# Altium PCB PCB_Motherboard.PcbDoc
Units mm, origin at the board's own origin, x right, y up, seen from the top; angles counter-clockwise.
Board outline 36.5 x 36.5 mm, 2 copper layers (Top Layer, Bottom Layer); 36 components, 36 nets, 146 pads, 310 vias.
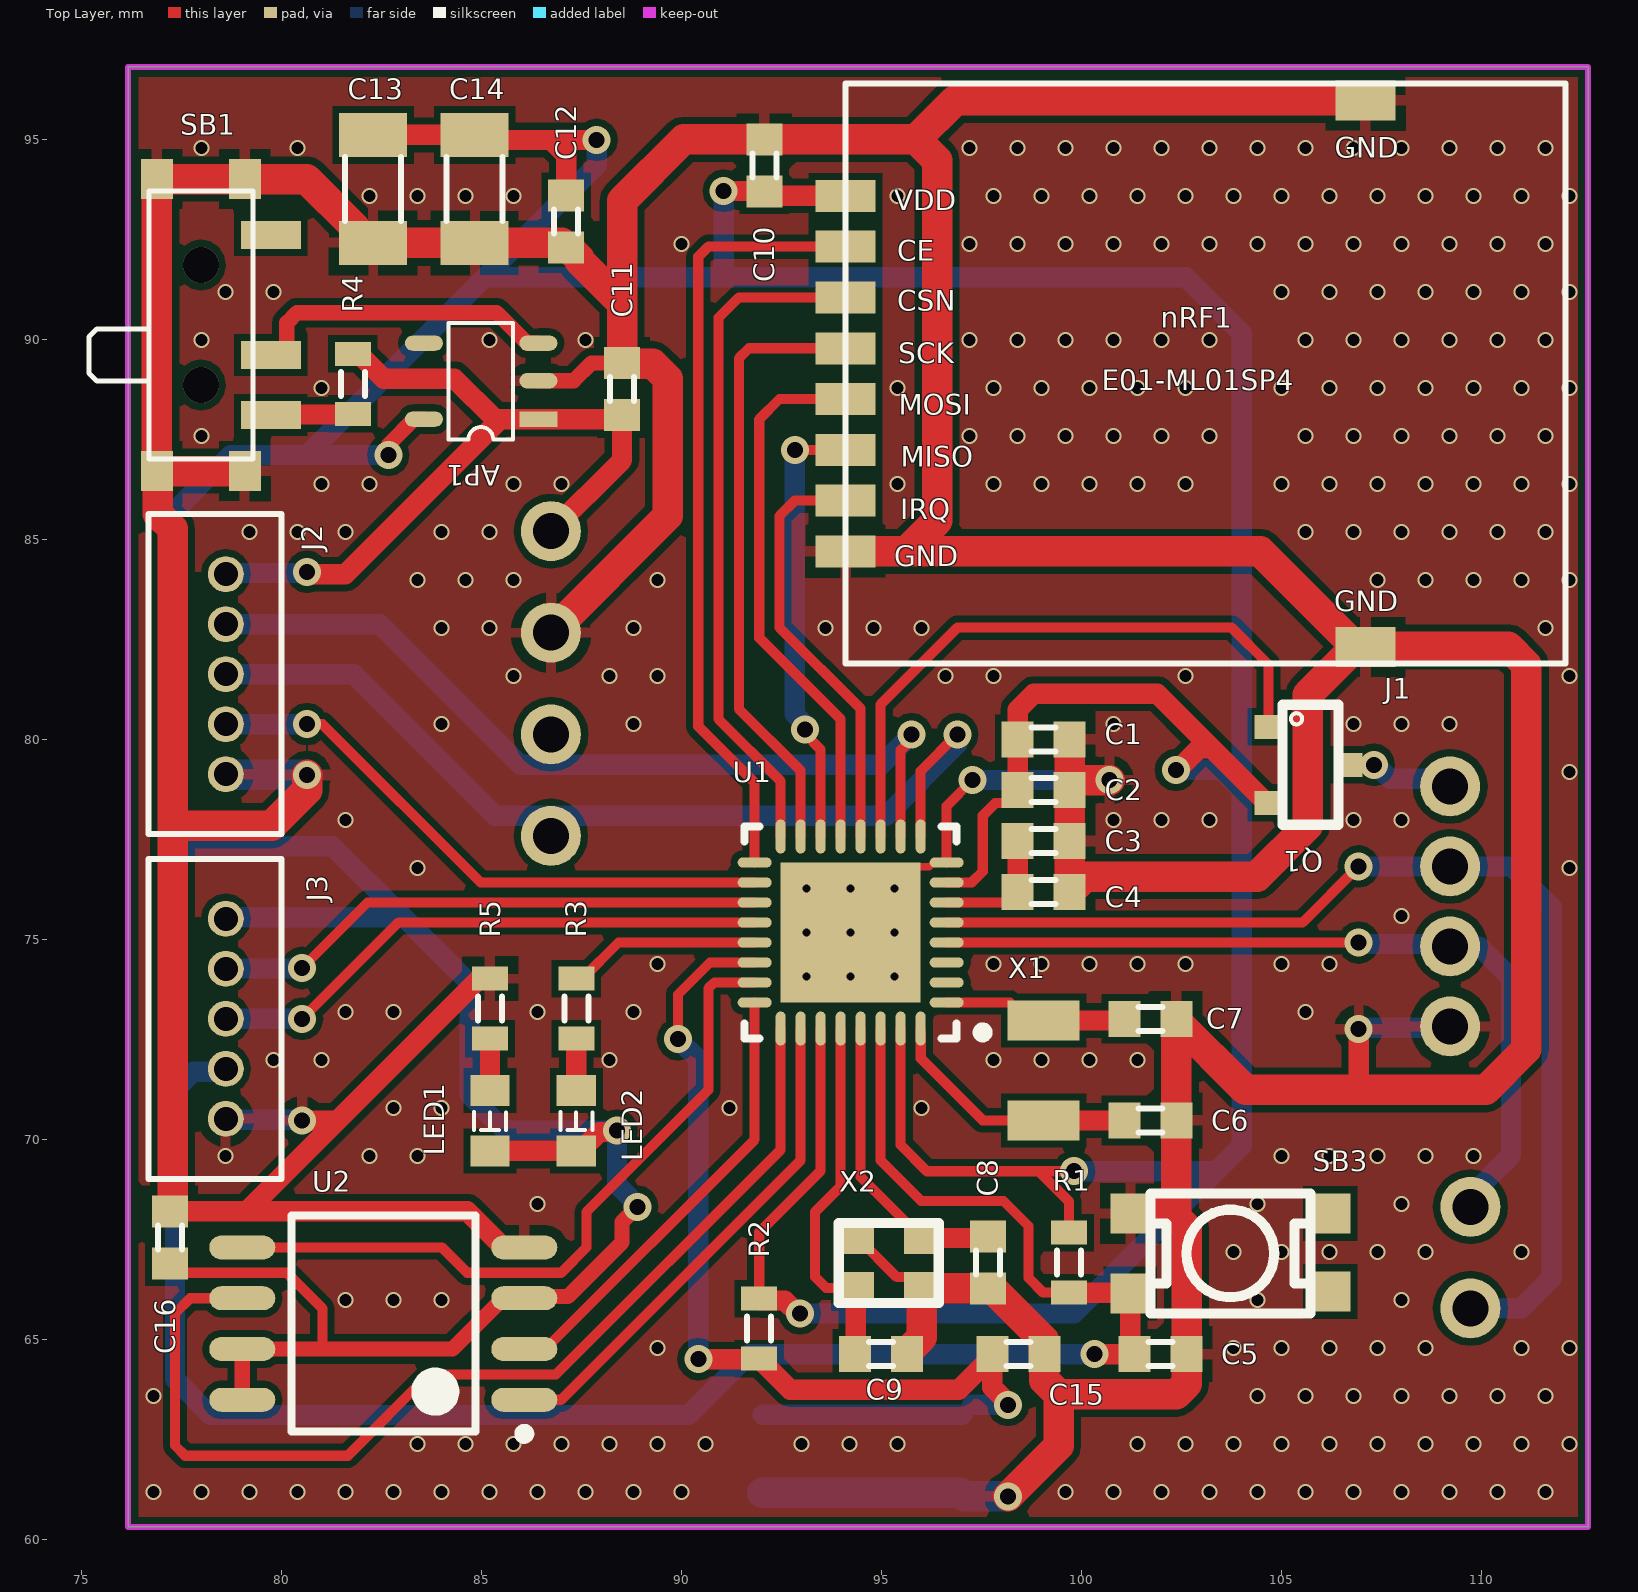
[diagram p0: Top Layer view]
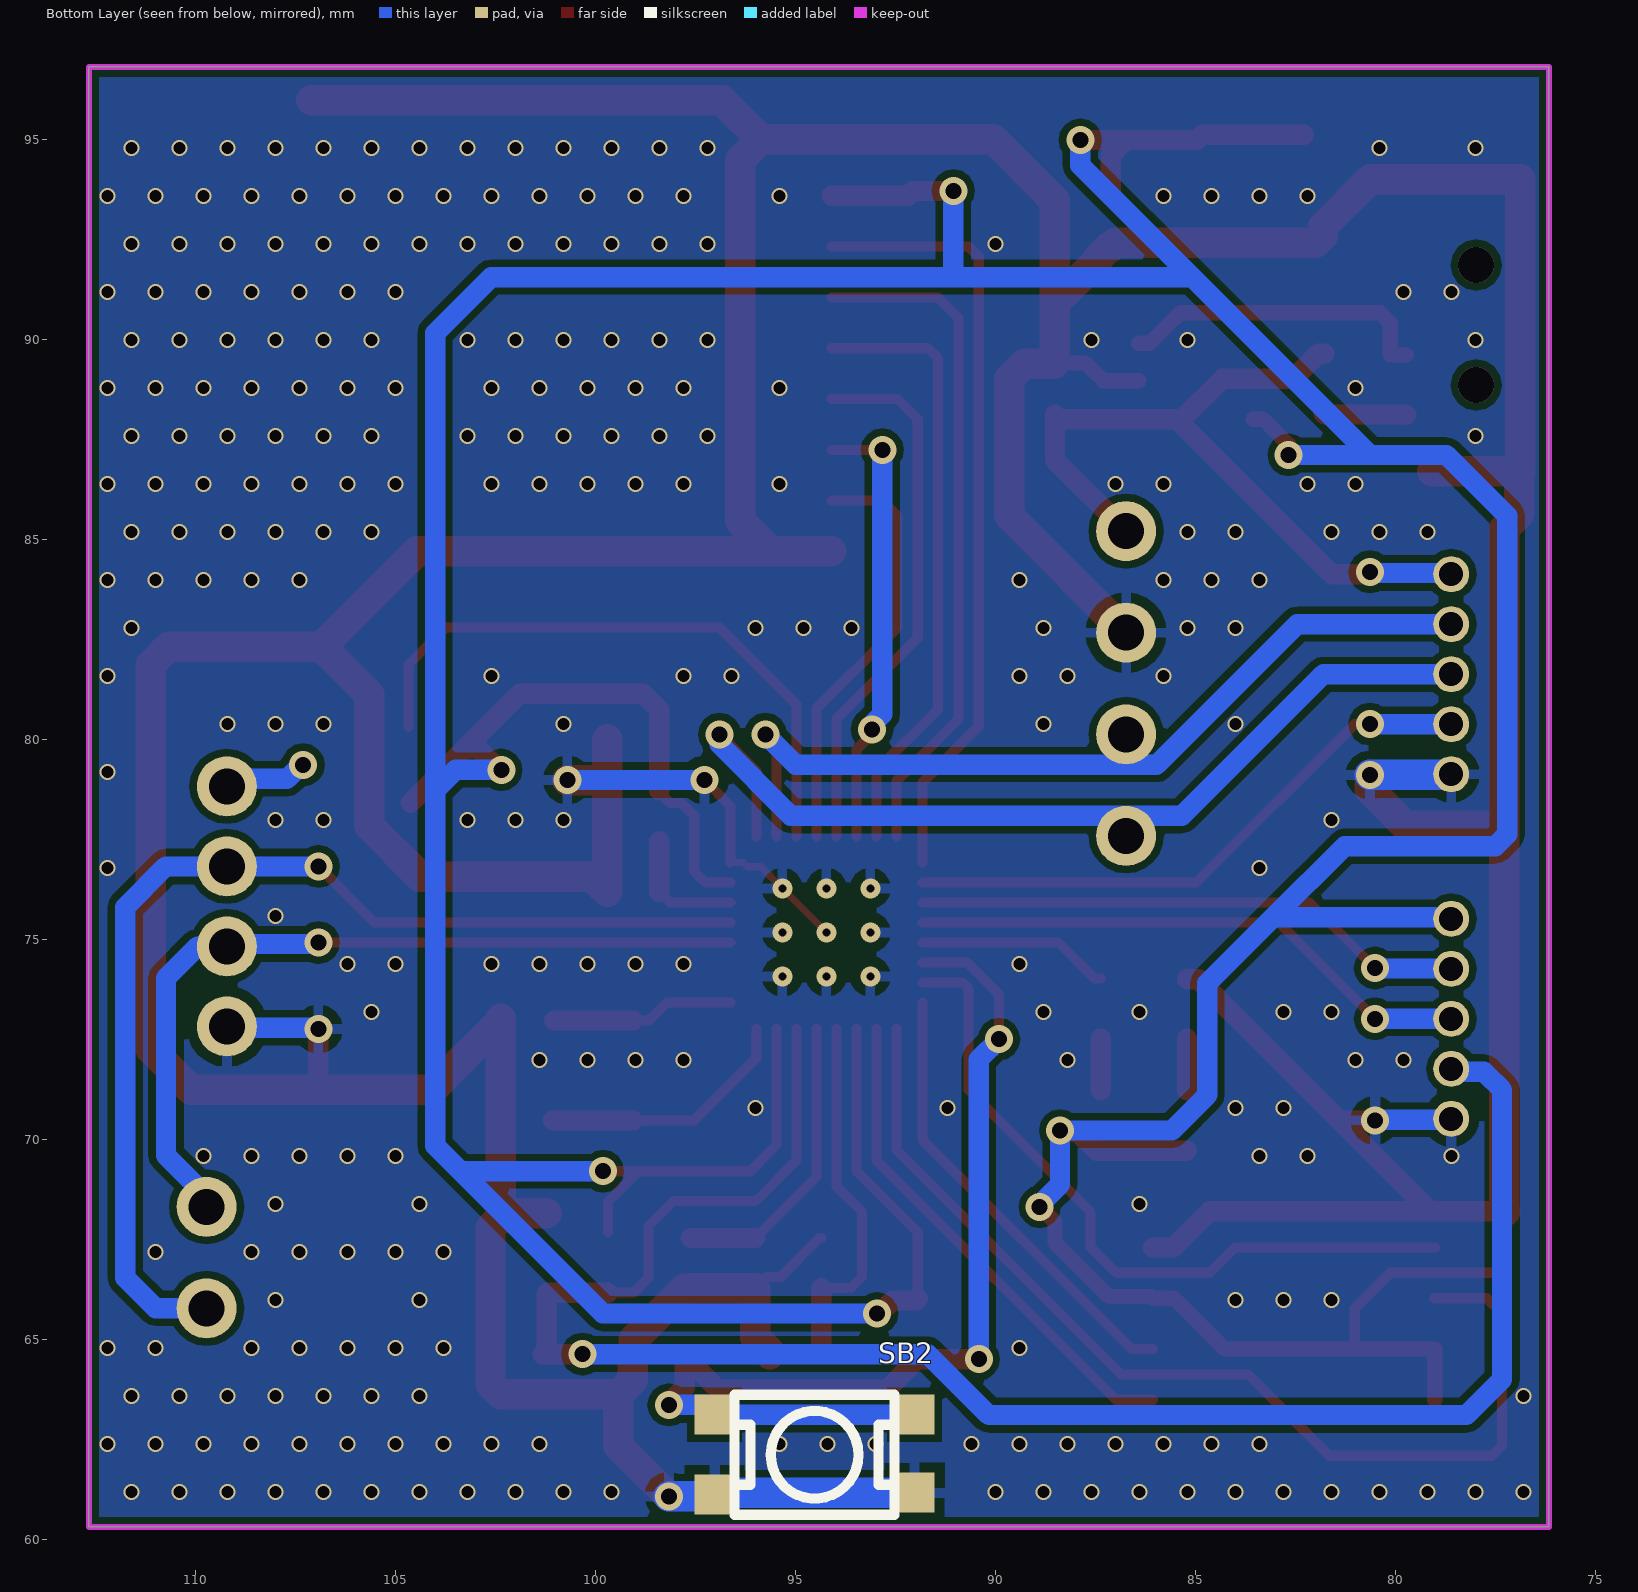
[diagram p1: Bottom Layer view, seen from below]
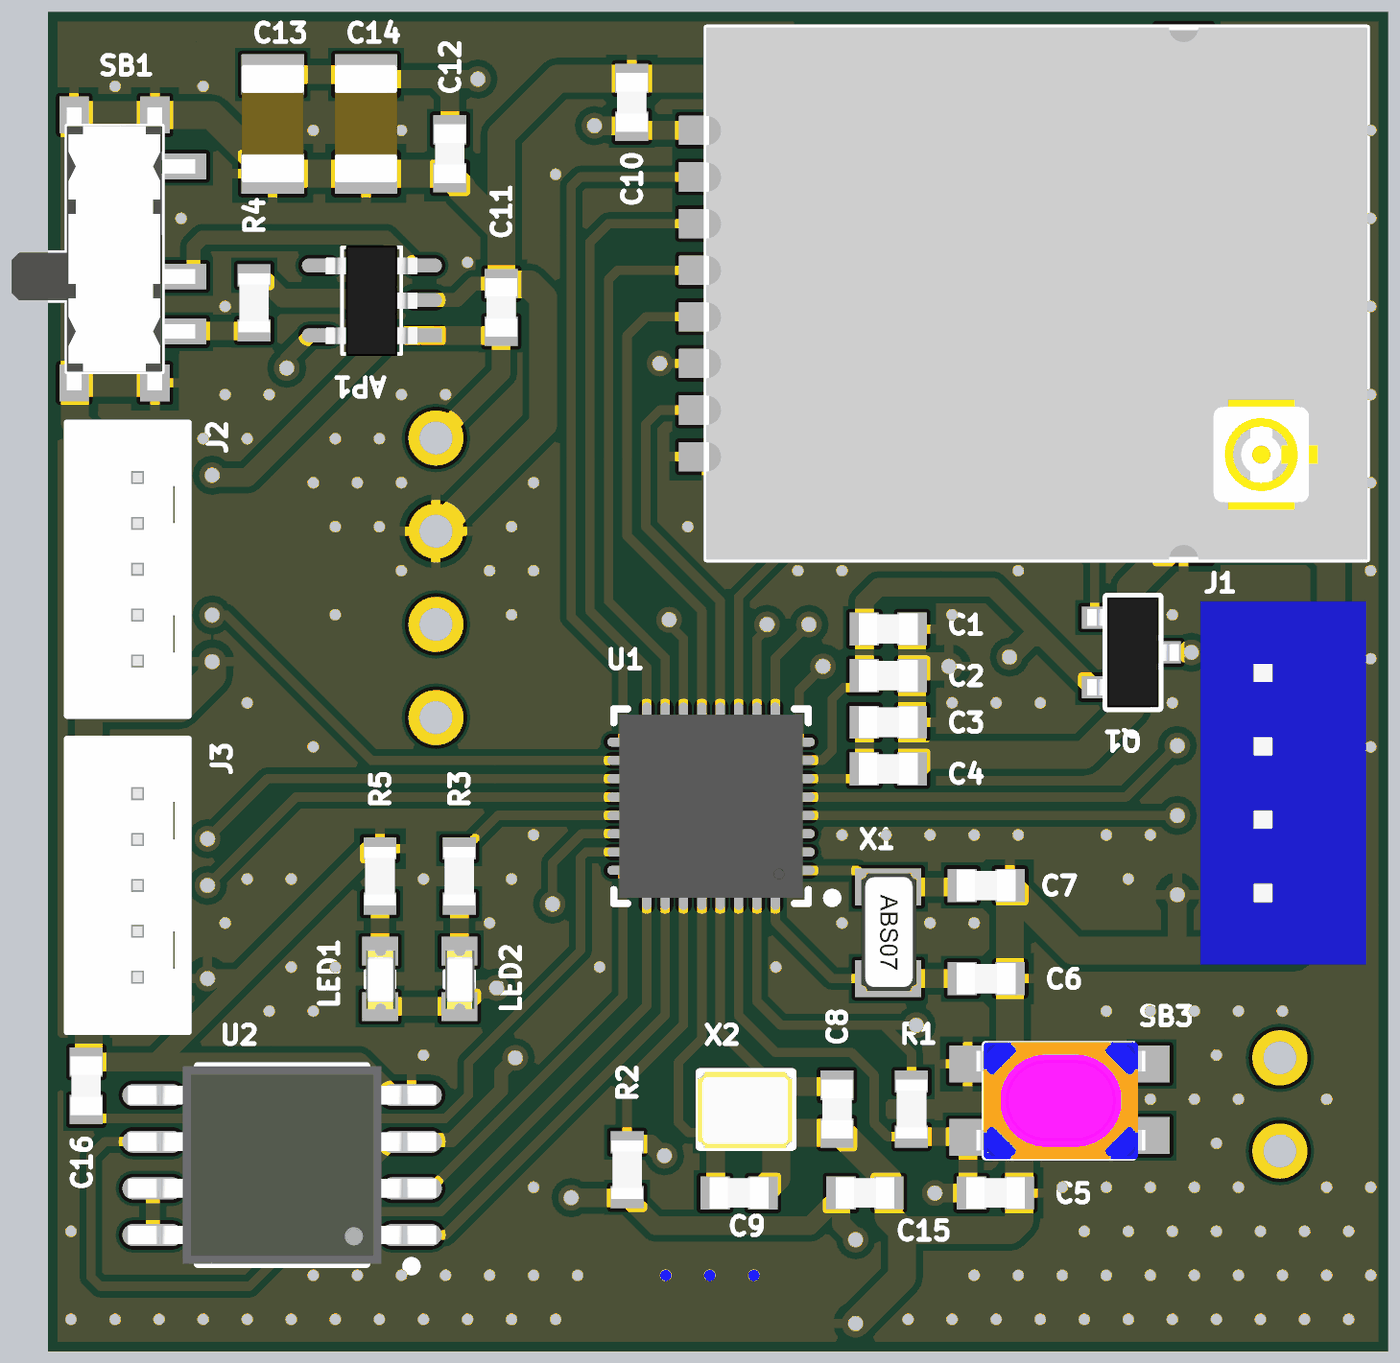
[diagram p2: 3D render of the assembled board from above, using the file's embedded part models]

## Layer stack, top to bottom
Top Solder: solder mask 0.0102, Solder Resist, Dk 3.5
Top Layer: signal copper 0.0356
Dielectric 1: dielectric 0.32, FR-4, Dk 4.8
Bottom Layer: signal copper 0.0356
Bottom Solder: solder mask 0.0102, Solder Resist, Dk 3.5

## Board outline
76.173,60.325 76.173,96.825 112.673,96.825 112.673,60.325

## Design rules (kind name [scope] priority, off if disabled: settings)
Clearance [All] p1: gap=0.178 ignorepadtopadclearanceinfootprint=FALSE
PolygonConnect [All] p1: connectstyle=Relief reliefconductorwidth=0.254 reliefentries=4 polygonreliefangle="90 Angle" airgapwidth=0.254
RoutingVias [All] p1: holewidth=0.711 width=1.27 viastyle="Through Hole" minholewidth=0.711 minwidth=1.27 maxholewidth=0.711 maxwidth=1.27
SolderMaskExpansion [All] p1: expansion=0.102
Width [All] p1: maxlimit=1.016 minlimit=0.178 preferedwidth=0.254
30 further rules are at their usual default settings.

## Classes and differential pairs
component class U_W25Q128: C16 U2
component class U_nRF24L01: C10 nRF1
component class U_NANO103: C1 C2 C3 C4 C5 C6 C7 C8 C9 R1 U1 X1 X2
component class Mobo: AP1 C11 C12 C13 C14 C15 J1 J2 J3 LED1 LED2 Q1 R2 R3 R4 R5 SB1 SB2 SB3

## Components (designator, comment, footprint, x,y, rotation, side; value= is the part's Value field where it differs from the comment)
AP1 "AP2112" SOT-23-5 85.796,87.506 r180 top
C1 "Cap" Cap_0603 99.06,80.01 r0 top value=0.1uF
C2 "Cap" Cap_0603 99.06,78.74 r0 top value=0.1uF
C3 "Cap" Cap_0603 99.06,77.47 r0 top value=1uF
C4 "Cap" Cap_0603 99.06,76.2 r0 top value=0.1uF
C5 "Cap" Cap_0603 101.981,64.643 r0 top value=0.1uF
C6 "Cap" Cap_0603 101.727,70.485 r0 top value=20pf
C7 "Cap" Cap_0603 101.727,73.025 r0 top value=20pf
C8 "Cap" Cap_0603 97.663,66.929 r270 top value=20pf
C9 "Cap" Cap_0603 94.996,64.643 r0 top value=20pf
C10 "Cap" Cap_0603 92.075,94.361 r90 top value=1uF
C11 "Cap" Cap_0603 88.519,88.773 r90 top value=10uF
C12 "Cap" Cap_0603 87.122,92.964 r270 top value=1uF
C13 "Cap" CAP_1206 82.296,95.123 r270 top value=100uF
C14 "Cap" CAP_1206 84.836,95.123 r270 top value=100uF
C15 "Cap" Cap_0603 98.425,64.643 r180 top value=0.1uF
C16 "Cap" Cap_0603 77.216,67.564 r90 top value=1uF
J1 "Plug4" JST_2.0mm_4pin_180 109.22,78.835 r270 top
J2 "Plug3" GH_1.25mm_Thru_5pin 78.613,84.141 r270 top
J3 "Plug3" GH_1.25mm_Thru_5pin 78.613,75.525 r270 top
LED1 "R" SMD-0603_LED 85.217,69.723 r90 top
LED2 "R" SMD-0603_LED 87.376,69.723 r90 top
nRF1 "NRF24L01" NRF24L01P+PA+LNA+IPX 112.107,96.404 r270 top
Q1 "SI2301DS-T1" SOT-23 106.68,79.375 r270 top
R1 "Res" RES_0603 99.695,66.929 r270 top value=10K
R2 "Res" RES_0603 91.948,65.278 r270 top value=100k
R3 "Res" RES_0603 87.376,73.279 r90 top value=330
R4 "Res" RES_0603 81.788,88.9 r270 top value=100K
R5 "Res" RES_0603 85.217,73.279 r270 top value=330
SB1 "SPDT" SS-SK-02P 77.978,90.424 r270 top
SB2 "SPST" "TACK-SW_SMD 2P 4x3mm_2" 96.528,60.627 r90 bottom
SB3 "SPST" "TACK-SW_SMD 2P 4x3mm_2" 101.727,65.659 r90 top
U1 "NANO103ZD3AE" MCU_QFN_33_5x5 94.234,75.184 r180 top
U2 "Flash" "8-Pin SOIC 208-mil" 82.55,65.405 r180 top
X1 "Xtal" X3215 99.06,72.985 r270 top value=32.768kHz
X2 "Xtal" 2520S 94.362,67.544 r0 top value=12MHz

## Footprints (in the part's own frame and the unit in brackets; to place one, negate y for a bottom-side part, rotate by r counter-clockwise, add the part's x,y. Pads: shape width x height; smd on the part's side, far side on the other; paste and mask are expansions set on the pad)
"8-Pin SOIC 208-mil" [mm]
  oval 1.65x0.6 smd: 1(-3.525,1.905) 2(-3.525,0.635) 3(-3.525,-0.635) 4(-3.525,-1.905) 5(3.525,-1.905) 6(3.525,-0.635) 7(3.525,0.635) 8(3.525,1.905)
  silkscreen extent -3.65,-2.7 2.3,2.88, body extent -4.2,-2.69 4.2,2.69, height 2.3
2520S [mm]
  rect 0.9x0.8 smd: 1(0,-1.25) 2(1.65,0) ""(0,0) ""(1.65,-1.25)
  silkscreen extent -0.43,-1.63 2.07,0.37, body extent -0.49,-1.69 2.11,0.41, height 0.55
Cap_0603 [mm]
  rect 0.8x0.9 smd: 1(-0.65,0) 2(0.65,0)
  silkscreen extent -0.3,-0.3 0.3,0.3, body extent -0.8,-0.43 0.8,0.43, height 0.83
CAP_1206 [mm]
  rect 1.1x1.7 smd: 1(0,0) 2(2.7,0)
  silkscreen extent 0.55,-0.7 2.15,0.7, body extent -0.26,-0.85 2.94,0.85, height 1.73
GH_1.25mm_Thru_5pin [mm]
  round 0.9 hole 0.6: 1(0,0) 2(1.25,0) 3(2.5,0) 4(3.75,0) 5(5,0)
  silkscreen extent -1.5,-1.93 6.5,1.4, body extent -1.5,-1.93 6.5,1.4, height 4.22
JST_2.0mm_4pin_180 [mm]
  round 1.5 hole 0.9: 1(0,0) 2(2,0) 3(4,0) 4(6,0)
  body extent -1.93,-1.65 7.97,2.85, height 6
MCU_QFN_33_5x5 [mm]
  oval 0.85x0.25 smd: 1(-2.4,1.75) 2(-2.4,1.25) 3(-2.4,0.75) 4(-2.4,0.25) 5(-2.4,-0.25) 6(-2.4,-0.75) 7(-2.4,-1.25) 8(-2.4,-1.75) 17(2.4,-1.75) 18(2.4,-1.25) 19(2.4,-0.75) 20(2.4,-0.25) 21(2.4,0.25) 22(2.4,0.75) 23(2.4,1.25) 24(2.4,1.75)
  oval 0.25x0.85 smd: 9(-1.75,-2.4) 10(-1.25,-2.4) 11(-0.75,-2.4) 12(-0.25,-2.4) 13(0.25,-2.4) 14(0.75,-2.4) 15(1.25,-2.4) 16(1.75,-2.4) 25(1.75,2.4) 26(1.25,2.4) 27(0.75,2.4) 28(0.25,2.4) 29(-0.25,2.4) 30(-0.75,2.4) 31(-1.25,2.4) 32(-1.75,2.4)
  rect 3.5x3.5 smd: 33(0,0)
  silkscreen extent -3.43,-2.65 2.65,2.65, body extent -2.5,-2.5 2.5,2.5, height 0.9
NRF24L01P+PA+LNA+IPX [mm]
  rect 0.8x1.5 smd: 1(2.805,-18) 2(4.075,-18) 3(5.345,-18) 4(6.615,-18) 5(7.885,-18) 6(9.155,-18) 7(10.425,-18) 8(11.695,-18)
  rect 1x1.5 smd: 9(14.08,-5) 10(0.42,-5)
  silkscreen extent 0,-18 14.5,0, body extent 0,-18 14.5,0, height 2.6
RES_0603 [mm]
  rect 0.6x0.9 smd: 1(-0.75,0) 2(0.75,0)
  silkscreen extent -0.3,-0.3 0.3,0.3, body extent -0.8,-0.43 0.8,0.43, height 0.48
SMD-0603_LED [mm]
  rect 0.78x0.98 smd: 1(0,0) 2(1.51,0)
  silkscreen extent 0.52,-0.4 0.97,0.4, body extent -0.08,-0.41 1.54,0.45, height 0.6
SOT-23 [mm]
  rect 0.6x0.7 smd: 1(-0.95,-2) 2(0.95,-2) 3(0,0)
  silkscreen extent -1.5,-1.65 1.5,-0.25, body extent -1.5,-2.2 1.5,0.3, height 1.05
SOT-23-5 [mm]
  rect 0.95x0.38 smd: 1(-0.63,-0.51)
  oval 0.95x0.38 smd: 2(-0.63,-1.47) 3(-0.63,-2.41) 4(2.23,-2.41) 5(2.23,-0.51)
  silkscreen extent 0,-2.91 1.61,0, body extent -0.44,-2.95 2.06,0.05, height 1.09
SS-SK-02P [mm]
  rect 0.7x1.5 smd: 1(-2.195,1.76) 2(0.805,1.76) 3(2.305,1.76)
  rect 1x0.8 smd: ""(-3.595,-1.09) ""(-3.595,1.11) ""(3.705,-1.09) ""(3.705,1.11)
  silkscreen extent -3.29,-2.79 3.41,1.31, body extent -3.79,-2.8 3.91,2.21, height 1.16
"TACK-SW_SMD 2P 4x3mm_2" [mm]
  rect 1x1 smd: 1(0.5,0.5) 1(0.55,-4.5) 2(2.5,-4.5) 2(2.5,0.5)
  silkscreen extent 0,-4 3,0, body extent -0.1,-4.33 3.1,0.26, height 2.5
X3215 [mm]
  rect 1x1.8 smd: 1(0,0) 2(2.5,0)
  body extent -0.38,-0.74 2.84,0.78, height 0.91

## Part data
J2 J3: library part Plug5
LED1 LED2: library part LED
nRF1: library part NRF24L01_module
Q1: "Trans MOSFET P-CH 20V 2.3A 3-Pin TO-236 T/R", Case/Package=SOT-23-3, Continuous Drain Current (ID)=2.3A, Drain to Source Resistance=130mR, Drain to Source Voltage (Vdss)=-20V, Gate to Source Voltage (Vgs)=8V, Manufacturer="Vishay Siliconix", Max Operating Temperature=150¢XC, Max Power Dissipation=1.25W, Min Operating Temperature=-55¢XC, Package Quantity=3000, Category=MOSFETs, ComponentLink1Description=https://datasheet.ciiva.com/13048/70627-115154-13048148.pdf?src-supplier=Mouser, ComponentLink1URL=https://datasheet.ciiva.com/13048/70627-115154-13048148.pdf?src-supplier=Mouser, Element Configuration=Single, Fall Time=36ns, Height=1.02mm, Length=3.04mm, Manufacturer Part Number=SI2301DS-T1, Mount="Surface Mount", Number of Channels=1, Number of Elements=1, Number of Pins=3, Packaging="Tape and Reel", Polarity=P-CH, Power Dissipation=1.25W, Pricing 1="143=0.17500, 500=0.15000, 1000=0.10000, 5000=0.09000, 10000=0.08000 (USD)", Rise Time=36ns, RoHS=No, Stock 1=12531, Supplier 1="Component Sense", Supplier Part Number 1=SI2301DS-T1, Turn-Off Delay Time=42ns, Turn-On Delay Time=13ns, Weight=0.050717oz, Width=1.4mm
SB1: library part Switch_Button2
SB2 SB3: library part Switch_Button1
U2: library part W25QXX
U1: OriginalSymbolOrigin=(0,0)

## Free pads (board coordinates)
  round 1.5 hole 0.9: ""(86.741,77.597) ""(86.741,80.137) ""(86.741,82.677) ""(86.741,85.217) ""(109.728,65.786) ""(109.728,68.326)

## Via types
v1: diameter 0.4, hole 0.3, Top Layer to Bottom Layer, tented both sides, 270 vias
v2: diameter 0.7, hole 0.4, Top Layer to Bottom Layer, tented both sides, 29 vias
v3: diameter 0.5, hole 0.2, Top Layer to Bottom Layer, tented both sides, 9 vias
v4: diameter 0.9, hole 0.9, Top Layer to Bottom Layer, 2 vias

## Nets (pads, with @x,y where several pads share a name; then routed paths per layer and width w, separated by ;. In a path a pad name is that pad's centre, name@x,y a point inside that pad or via, vN(x,y) a via of type N, cw(c..) or ccw(c..) an arc to the next point about the centre after c; other vN are vias at no path point)
CE: nRF1.2 U1.17 | length 19.5
  Top Layer w0.254: U1.17 91.834,78.925 90.424,80.335 90.424,92.075 90.678,92.329 nRF1.2
GND: AP1.2 C1.2 C2.2 C3.2 C4.2 C5.2 C6.2 C7.2 C8.2 C9.2 C10.2 C11.2 C12.2 C13.2 C14.2 C15.1 C16.2 J1.4 J2.5 J3.5 nRF1.8 nRF1.9 nRF1.10 pad.@86.741,82.677 R5.1 SB1. SB2.1 SB3.2@101.227,68.159 U1.8 U1.33 U2.4 X2. | length 212.5
  Top Layer w0.178: v3(94.234,75.184) v3(95.334,76.284) 95.876,76.826 96.206,76.826 96.314,76.934 U1.8
  Top Layer w0.254: X2.@94.362,67.544 94.412,67.544 95.389,66.567 95.739,66.567 X2.@96.012,66.294 ; U1.8 96.634,78.346 v2(97.282,78.994)
  Top Layer w0.381: AP1.2 87.31,88.976 87.757,89.423 C11.2
  Top Layer w0.508: C16.2 77.266,68.214 79.136,68.214 ; v2(80.518,70.485) 81.407,70.485 ; R5.1 85.217,74.017 84.939,74.017 81.407,70.485 ; U2.4 85.55,67.31 84.646,68.214 79.136,68.214 ; 106.934,71.247 v2(106.934,72.771) ; 79.136,68.214 81.407,70.485
  Top Layer w0.762: C16.2@77.266,68.214 77.285,68.233 77.285,77.851 ; J2.5 J2.5@78.633,79.121 ; SB1.@79.088,86.719 SB1.@76.888,86.719 ; v2(80.645,79.121) 80.645,78.74 79.756,77.851 77.285,77.851 ; pad.@86.741,82.677 89.662,85.598 89.662,89.027 89.285,89.404 88.538,89.404 C11.2 88.519,90.917 ; nRF1.8 95.631,84.709 ; C9.2 95.646,64.693 96.012,65.059 96.012,66.294 96.02,66.286 97.656,66.286 C8.2 97.779,66.279 99.056,65.002 99.056,64.612 99.075,64.593 99.075,63.993 99.434,63.634 ; v2(98.171,61.087) 99.434,62.35 99.434,63.634 ; C4.2 C4.2@99.71,76.25 ; C1.2 C2.2 ; v2(100.711,78.994) 99.964,78.994 C2.2 ; SB3.2@101.227,68.159 102.275,68.159 ; C7.2 C7.2@102.377,72.975 ; nRF1.10 96.843,95.984 95.87,95.011 ; SB1.@76.888,86.719 76.907,86.7 76.907,85.653 77.285,85.275 77.285,77.851 ; SB1.@76.888,86.719 76.888,94.019 79.088,94.019 80.631,94.019 81.827,92.823 81.827,92.592 81.996,92.423 C13.2 C14.2 87.013,92.423 C12.2 87.172,92.314 87.445,92.041 87.445,91.991 88.519,90.917 ; 88.519,90.917 88.519,93.472 90.058,95.011 C10.2 95.87,95.011 ; 95.631,84.709 104.472,84.709 nRF1.9@106.857,82.324 ; 95.631,84.709 96.393,85.471 96.393,94.488 95.87,95.011 ; 99.434,63.634 102.369,63.634 102.631,63.896 C5.2 102.631,67.803 102.275,68.159 ; C4.2@99.71,76.25 C3.2 C2.2 ; C4.2@99.71,76.25 99.729,76.269 99.779,76.269 100.091,76.581 104.394,76.581 105.664,77.851 105.664,81.131 nRF1.9@106.857,82.324 ; 102.275,68.159 102.377,68.261 C6.2 C7.2@102.377,72.975 ; C7.2@102.377,72.975 104.105,71.247 106.934,71.247 110.109,71.247 111.125,72.263 111.125,81.878 110.679,82.324 nRF1.9 nRF1.9@106.857,82.324
  Bottom Layer w0.254: SB2.1@96.978,61.177 97.028,61.127 SB2.1@97.068,61.087
  Bottom Layer w0.508: J3.5 78.633,70.505 80.498,70.505 v2(80.518,70.485) ; v2(97.282,78.994) v2(100.711,78.994) ; v2(106.934,72.771) 106.966,72.803 109.188,72.803 J1.4
  Bottom Layer w0.762: J2.5 78.633,79.121 v2(80.645,79.121) ; SB2.1@92.028,61.177 SB2.1@96.978,61.177 ; SB2.1@97.068,61.087 v2(98.171,61.087)
  other v1: 76.8,61.2 78,61.2 79.2,61.2 80.4,61.2 81.6,61.2 82.8,61.2 84,61.2 85.2,61.2 86.4,61.2 87.6,61.2 88.8,61.2 90,61.2 99.6,61.2 100.8,61.2 102,61.2 103.2,61.2 104.4,61.2 105.6,61.2 106.8,61.2 108,61.2 109.2,61.2 110.4,61.2 111.6,61.2 83.4,62.4 84.6,62.4 85.8,62.4 87,62.4 88.2,62.4 89.4,62.4 90.6,62.4 93,62.4 94.2,62.4 95.4,62.4 101.4,62.4 102.6,62.4 103.8,62.4 105,62.4 106.2,62.4 107.4,62.4 108.6,62.4 109.8,62.4 111,62.4 112.2,62.4 76.8,63.6 104.4,63.6 105.6,63.6 106.8,63.6 108,63.6 109.2,63.6 110.4,63.6 111.6,63.6 89.4,64.8 103.8,64.8 105,64.8 106.2,64.8 107.4,64.8 108.6,64.8 111,64.8 112.2,64.8 81.6,66 82.8,66 84,66 104.4,66 108,66 103.8,67.2 105,67.2 106.2,67.2 107.4,67.2 108.6,67.2 111,67.2 86.4,68.4 104.4,68.4 108,68.4 78.6,69.6 82.2,69.6 83.4,69.6 105,69.6 106.2,69.6 107.4,69.6 108.6,69.6 109.8,69.6 82.8,70.8 84,70.8 91.2,70.8 96,70.8 79.8,72 81,72 88.2,72 97.8,72 99,72 100.2,72 101.4,72 81.6,73.2 82.8,73.2 86.4,73.2 88.8,73.2 105.6,73.2 89.4,74.4 97.8,74.4 99,74.4 100.2,74.4 101.4,74.4 102.6,74.4 105,74.4 106.2,74.4 108,75.6 83.4,76.8 112.2,76.8 81.6,78 100.8,78 102,78 103.2,78 106.8,78 108,78 112.2,79.2 84,80.4 88.8,80.4 100.8,80.4 106.8,80.4 108,80.4 109.2,80.4 85.8,81.6 88.2,81.6 89.4,81.6 96.6,81.6 97.8,81.6 102.6,81.6 112.2,81.6 84,82.8 85.2,82.8 88.8,82.8 93.6,82.8 94.8,82.8 96,82.8 111.6,82.8 83.4,84 84.6,84 85.8,84 89.4,84 107.4,84 108.6,84 109.8,84 111,84 112.2,84 79.2,85.2 80.4,85.2 81.6,85.2 84,85.2 85.2,85.2 105.6,85.2 106.8,85.2 108,85.2 109.2,85.2 110.4,85.2 111.6,85.2 81,86.4 82.2,86.4 85.8,86.4 87,86.4 95.4,86.4 97.8,86.4 99,86.4 100.2,86.4 101.4,86.4 102.6,86.4 105,86.4 106.2,86.4 107.4,86.4 108.6,86.4 109.8,86.4 111,86.4 112.2,86.4 78,87.6 97.2,87.6 98.4,87.6 99.6,87.6 100.8,87.6 102,87.6 103.2,87.6 105.6,87.6 106.8,87.6 108,87.6 109.2,87.6 110.4,87.6 111.6,87.6 81,88.8 95.4,88.8 97.8,88.8 99,88.8 100.2,88.8 101.4,88.8 102.6,88.8 105,88.8 106.2,88.8 107.4,88.8 108.6,88.8 109.8,88.8 111,88.8 112.2,88.8 78,90 85.2,90 87.6,90 97.2,90 98.4,90 99.6,90 100.8,90 102,90 103.2,90 105.6,90 106.8,90 108,90 109.2,90 110.4,90 111.6,90 78.6,91.2 79.8,91.2 105,91.2 106.2,91.2 107.4,91.2 108.6,91.2 109.8,91.2 111,91.2 112.2,91.2 90,92.4 97.2,92.4 98.4,92.4 99.6,92.4 100.8,92.4 102,92.4 103.2,92.4 104.4,92.4 105.6,92.4 106.8,92.4 108,92.4 109.2,92.4 110.4,92.4 111.6,92.4 82.2,93.6 83.4,93.6 84.6,93.6 85.8,93.6 95.4,93.6 97.8,93.6 99,93.6 100.2,93.6 101.4,93.6 102.6,93.6 103.8,93.6 105,93.6 106.2,93.6 107.4,93.6 108.6,93.6 109.8,93.6 111,93.6 112.2,93.6 78,94.8 80.4,94.8 97.2,94.8 98.4,94.8 99.6,94.8 100.8,94.8 102,94.8 103.2,94.8 104.4,94.8 105.6,94.8 106.8,94.8 108,94.8 109.2,94.8 110.4,94.8 111.6,94.8
  other v3: 93.134,74.084 94.234,74.084 95.334,74.084 93.134,75.184 95.334,75.184 93.134,76.284 94.234,76.284
I2C0_SCK: U1.2
I2C0_SDA: U1.3
ICE_CLK: J3.3 U1.20 | length 14.2
  Top Layer w0.254: v2(80.518,73.025) 82.927,75.434 U1.20
  Bottom Layer w0.508: J3.3 v2(80.518,73.025)
ICE_DAT: J3.2 U1.19 | length 13.9
  Top Layer w0.254: v2(80.518,74.295) 82.157,75.934 U1.19
  Bottom Layer w0.508: J3.2 78.623,74.285 80.508,74.285 v2(80.518,74.295)
IRQ: nRF1.7 U1.12 | length 10.7
  Top Layer w0.254: nRF1.7 92.837,85.979 92.456,85.598 92.456,82.804 94.484,80.776 U1.12
LDO_CAP: C3.1 C4.1 U1.6 | length 3.2
  Top Layer w0.254: U1.6 98.144,75.934 C4.1
  Top Layer w0.508: C4.1 C3.1
NetAP1_3: AP1.3 SB1.2 | length 7.9
  Top Layer w0.381: SB1.2 80.138,89.619 80.138,90.425 80.391,90.678 85.38,90.678 86.142,89.916 AP1.3
NetJ1_1: J1.1 Q1.3 | length 2.1
  Bottom Layer w0.508: v2(107.315,79.375) 107.367,79.375 107.717,79.025 109.03,79.025 J1.1
NetLED1_2: LED1.2 R5.2 | length 1.3
  Top Layer w0.508: LED1.2@85.217,71.233 R5.2
NetLED2_2: LED2.2 R3.1 | length 1.3
  Top Layer w0.508: LED2.2@87.376,71.233 R3.1
NetR4_2: R4.2 SB1.3 | length 2.1
  Top Layer w0.508: SB1.3 79.754,88.134 81.773,88.134 R4.2 R4.2@81.804,88.166
nRESET: C5.1 J3.4 R1.2 SB3.1@101.227,66.159 U1.30 | length 47
  Top Layer w0.254: U1.30 94.984,69.481 95.995,68.47 98.054,68.47 98.679,67.844 98.679,66.548 99.048,66.179 R1.2
  Top Layer w0.508: R1.2 101.207,66.179 101.227,66.159 101.227,64.747 C5.1 v2(100.33,64.643)
  Bottom Layer w0.508: J3.4 78.538,71.7 77.796,71.7 77.343,71.247 77.343,64.008 78.232,63.119 90.17,63.119 91.694,64.643 v2(100.33,64.643)
PA0: R3.2 U1.21 | length 4.8
  Top Layer w0.254: R3.2 87.526,74.029 88.431,74.934 U1.21
PA2: C15.2 R2.2 SB2.2 U1.22 | length 27.3
  Top Layer w0.254: v2(89.916,72.517) 89.916,73.634 90.716,74.434 U1.22
  Top Layer w0.508: v2(90.424,64.516) 91.936,64.516 R2.2 92.722,63.754 96.936,63.754 C15.2@97.775,64.593 ; C15.2 C15.2@97.775,64.593 ; v2(98.171,63.373) 98.171,63.416 97.775,63.812 C15.2@97.775,64.593
  Bottom Layer w0.254: SB2.2@97.028,63.127 SB2.2@97.274,63.373
  Bottom Layer w0.508: v2(89.916,72.517) 90.424,72.009 v2(90.424,64.516) ; SB2.2@92.028,63.127 SB2.2@97.028,63.127 ; SB2.2@97.274,63.373 v2(98.171,63.373)
PA14: J2.4 U1.18 | length 14.9
  Top Layer w0.254: v2(80.645,80.391) 81.026,80.391 84.983,76.434 U1.18
  Bottom Layer w0.508: J2.4 v2(80.645,80.391)
PB2: Q1.1 U1.11 | length 15.7
  Top Layer w0.254: U1.11 94.984,80.887 96.901,82.804 103.759,82.804 104.68,81.883 Q1.1
SPI0_MISO: nRF1.6 U1.14 | length 11.2
  Top Layer w0.254: v2(92.837,87.249) nRF1.6 ; v2(93.091,80.264) 93.091,80.143 93.484,79.75 U1.14
  Bottom Layer w0.508: v2(92.837,87.249) 92.837,80.639 93.091,80.385 v2(93.091,80.264)
SPI0_MOSI: nRF1.5 U1.13 | length 13.6
  Top Layer w0.254: U1.13 93.984,80.514 91.948,82.55 91.948,88.011 92.456,88.519 nRF1.5
SPI0_SCLK: nRF1.4 U1.15 | length 15.4
  Top Layer w0.254: U1.15 92.984,79.228 91.44,80.772 91.44,89.535 91.694,89.789 nRF1.4
SPI0_SS: nRF1.3 U1.16 | length 17
  Top Layer w0.254: U1.16 92.484,78.966 90.932,80.518 90.932,90.551 91.44,91.059 nRF1.3
SPI3_MISO: U1.24 U2.2 | length 11.4
  Top Layer w0.254: U2.2 86.6,64.77 91.834,70.004 U1.24
SPI3_MOSI: U1.23 U2.5 | length 18.1
  Top Layer w0.254: U2.5 84.01,67.31 84.645,66.675 86.995,66.675 87.63,67.31 87.63,68.199 90.678,71.247 90.678,73.785 90.827,73.934 U1.23
SPI3_SCLK: U1.25 U2.6 | length 26.6
  Top Layer w0.254: U2.6 77.724,66.04 77.343,65.659 77.343,62.357 77.597,62.103 81.661,62.103 83.693,64.135 86.868,64.135 92.484,69.751 U1.25
SPI_SS: U1.26 U2.1 | length 12.7
  Top Layer w0.254: U2.1 86.995,63.5 92.984,69.489 U1.26
UART0_RX: J2.3 pad.@86.741,77.597 U1.9 | length 23.7
  Top Layer w0.254: U1.9 95.984,79.22 v2(96.901,80.137)
  Bottom Layer w0.508: J2.3 81.808,81.641 85.344,78.105 95.123,78.105 96.901,79.883 v2(96.901,80.137)
UART0_TX: J2.2 pad.@86.741,80.137 U1.10 | length 21.6
  Top Layer w0.254: U1.10 95.484,79.742 95.758,80.016 v2(95.758,80.137)
  Bottom Layer w0.508: J2.2 82.463,82.891 85.979,79.375 94.996,79.375 v2(95.758,80.137)
UART1_RX: J1.3 pad.@109.728,68.326 U1.4 | length 20.6
  Top Layer w0.254: U1.4 96.636,74.932 v2@106.934,74.932
  Bottom Layer w0.508: v2(106.934,74.93) 106.971,74.893 109.162,74.893 J1.3 109.95,74.835 110.744,74.041 110.744,69.61 109.728,68.594 pad.@109.728,68.326
UART1_TX: J1.2 pad.@109.728,65.786 U1.5 | length 27.7
  Top Layer w0.254: U1.5 105.533,75.434 v2(106.934,76.835)
  Bottom Layer w0.508: v2(106.934,76.835) J1.2 110.744,76.835 111.76,75.819 111.76,66.548 110.998,65.786 pad.@109.728,65.786
VBAT: AP1.5 C1.1 C2.1 C10.1 C12.1 C13.1 C14.1 C16.1 J3.1 LED1.1 LED2.1 nRF1.1 Q1.2 R1.1 R2.1 U1.7 U1.27 U1.31 U2.3 U2.7 U2.8 | length 173.3
  Top Layer w0.254: C16.1 77.455,66.675 80.137,66.675 81.026,65.786 81.026,64.77 ; R2.1 92.098,66.028 91.948,66.178 91.948,67.691 93.484,69.227 U1.27 ; C10.1 C10.1@92.187,93.599 ; U1.31 95.484,69.87 96.139,69.215 98.933,69.215 ; U1.7 96.636,76.436 97.264,76.436 97.536,76.708 97.536,78.105 97.848,78.417 98.137,78.417 98.41,78.69 C2.1 ; R1.1 99.695,68.453 98.933,69.215 ; v2(99.822,69.215) 98.933,69.215 ; Q1.2@104.63,78.425 Q1.2
  Top Layer w0.381: U2.8 U2.7 81.026,64.77 84.28,64.77 85.55,66.04 U2.3 86.117,66.082 87.164,66.082 88.519,67.437 88.519,67.945 v2(88.9,68.326) ; v2(82.677,87.122) 82.677,87.376 83.316,88.015 AP1.5
  Top Layer w0.508: C13.1 C14.1 84.963,94.996 86.741,94.996 ; LED1.1 LED2.1 87.476,69.723 87.947,70.194 88.355,70.194 v2(88.392,70.231) ; C12.1 87.122,94.615 86.741,94.996 ; v2(87.884,94.996) 86.741,94.996 ; v2(91.059,93.726) 91.067,93.718 92.067,93.718 C10.1 ; R2.1 91.994,65.982 92.589,65.982 92.912,65.659 v2(92.964,65.659) ; C10.1@92.187,93.599 nRF1.1 ; C2.1 C1.1 98.41,80.757 98.806,81.153 101.902,81.153 103.266,79.789 ; v2(102.362,79.248) 102.414,79.248 102.955,79.789 103.266,79.789 ; Q1.2@104.63,78.425 103.266,79.789
  Bottom Layer w0.508: J3.1 78.653,75.565 83.058,75.565 ; v2(82.677,87.122) 80.645,87.122 ; v2(87.884,94.996) 87.884,94.361 85.09,91.567 ; v2(88.9,68.326) 88.9,68.378 88.392,68.886 v2(88.392,70.231) 85.598,70.231 84.709,71.12 84.709,73.914 83.058,75.565 ; v2(91.059,93.726) 91.059,91.567 ; v2(92.964,65.659) 99.822,65.659 103.378,69.215 ; v2(99.822,69.215) 103.378,69.215 ; v2(102.362,79.248) 103.505,79.248 104.013,78.74 ; 80.645,87.122 85.09,91.567 ; 80.645,87.122 78.74,87.122 77.216,85.598 77.216,77.641 77.514,77.343 81.28,77.343 83.058,75.565 ; 85.09,91.567 91.059,91.567 ; 91.059,91.567 102.616,91.567 104.013,90.17 104.013,78.74 ; 103.378,69.215 104.013,69.85 104.013,78.74
VCC: AP1.1 C11.1 J2.1 pad.@86.741,85.217 R4.1 | length 20.5
  Top Layer w0.508: v2@80.645,84.141 81.601,84.141 85.471,88.011 ; R4.1 81.938,89.65 82.561,89.027 84.328,89.027 85.344,88.011 85.471,88.011 ; pad.@86.741,85.217 88.519,86.995 C11.1 88.412,88.016 AP1.1 ; 85.471,88.011 86.421,88.011 AP1.1 ; 85.471,88.011 85.476,88.016 AP1.1
  Bottom Layer w0.508: J2.1 78.643,84.171 80.615,84.171 v2(80.645,84.201)
X24MI: C9.1 U1.28 X2.1 | length 9.1
  Top Layer w0.254: U1.28 93.984,68.838 93.345,68.199 93.345,66.57 93.621,66.294 X2.1 ; C9.1@94.346,64.77 C9.1@94.362,64.786
  Top Layer w0.508: C9.1@94.362,64.786 X2.1
X24MO: C8.1 U1.29 X2.2 | length 7.5
  Top Layer w0.254: U1.29 94.484,69.072 X2.2 ; C8.1@97.628,67.544 C8.1
  Top Layer w0.508: X2.2 C8.1@97.628,67.544
X32I: C7.1 U1.1 X1.1 | length 4.6
  Top Layer w0.254: U1.1 98.211,73.434 98.66,72.985 X1.1 ; C7.1@101.037,72.985 C7.1
  Top Layer w0.508: X1.1 C7.1@101.037,72.985
X32O: C6.1 U1.32 X1.2 | length 6.5
  Top Layer w0.254: U1.32 95.984,72.653 95.986,72.651 95.986,72.035 97.536,70.485 X1.2
  Top Layer w0.508: X1.2 C6.1
pads on no net: AP1.4 SB1.1 SB3.1@106.227,66.209 SB3.2@106.227,68.159
copper on no net:
  other v4: 77.988,88.869 77.988,91.869

## Polygon pours and split planes (outlines as drawn)
GND on Top Layer (solid, pour order 0): 76.173,96.825 112.673,96.825 112.673,60.325 76.173,60.325
GND on Bottom Layer (solid, pour order 2): 76.173,96.825 112.673,96.825 112.673,60.325 76.173,60.325

## Keep-outs
Keep-Out Layer:
  the board outline again, w0.15

## Text inside footprints (layer, text, board x,y; h text height)
nRF1: Top Overlay "GND" at 95.321,84.339 h0.51; Top Overlay "IRQ" at 95.471,85.519 h0.51; Top Overlay "MISO" at 95.491,86.829 h0.51; Top Overlay "MOSI" at 95.441,88.129 h0.51; Top Overlay "SCK" at 95.421,89.409 h0.51; Top Overlay "CSN" at 95.401,90.729 h0.51; Top Overlay "CE" at 95.401,91.979 h0.51; Top Overlay "VDD" at 95.321,93.239 h0.51; Top Overlay "GND" at 106.336,94.549 h0.51; Top Overlay "GND" at 106.326,83.219 h0.51; Top Overlay "E01-ML01SP4" at 100.506,88.733 h0.51